# Altium PCB PCB.PcbDoc (part 1 of 2)
Units mm, origin at the board's own origin, x right, y up, seen from the top; angles counter-clockwise.
Board outline 44.8 x 23.3 mm, 4 copper layers (Top Layer, GND, VDD, Bottom Layer), stack 1.192 mm thick; 40 components, 63 nets, 241 pads, 86 vias.
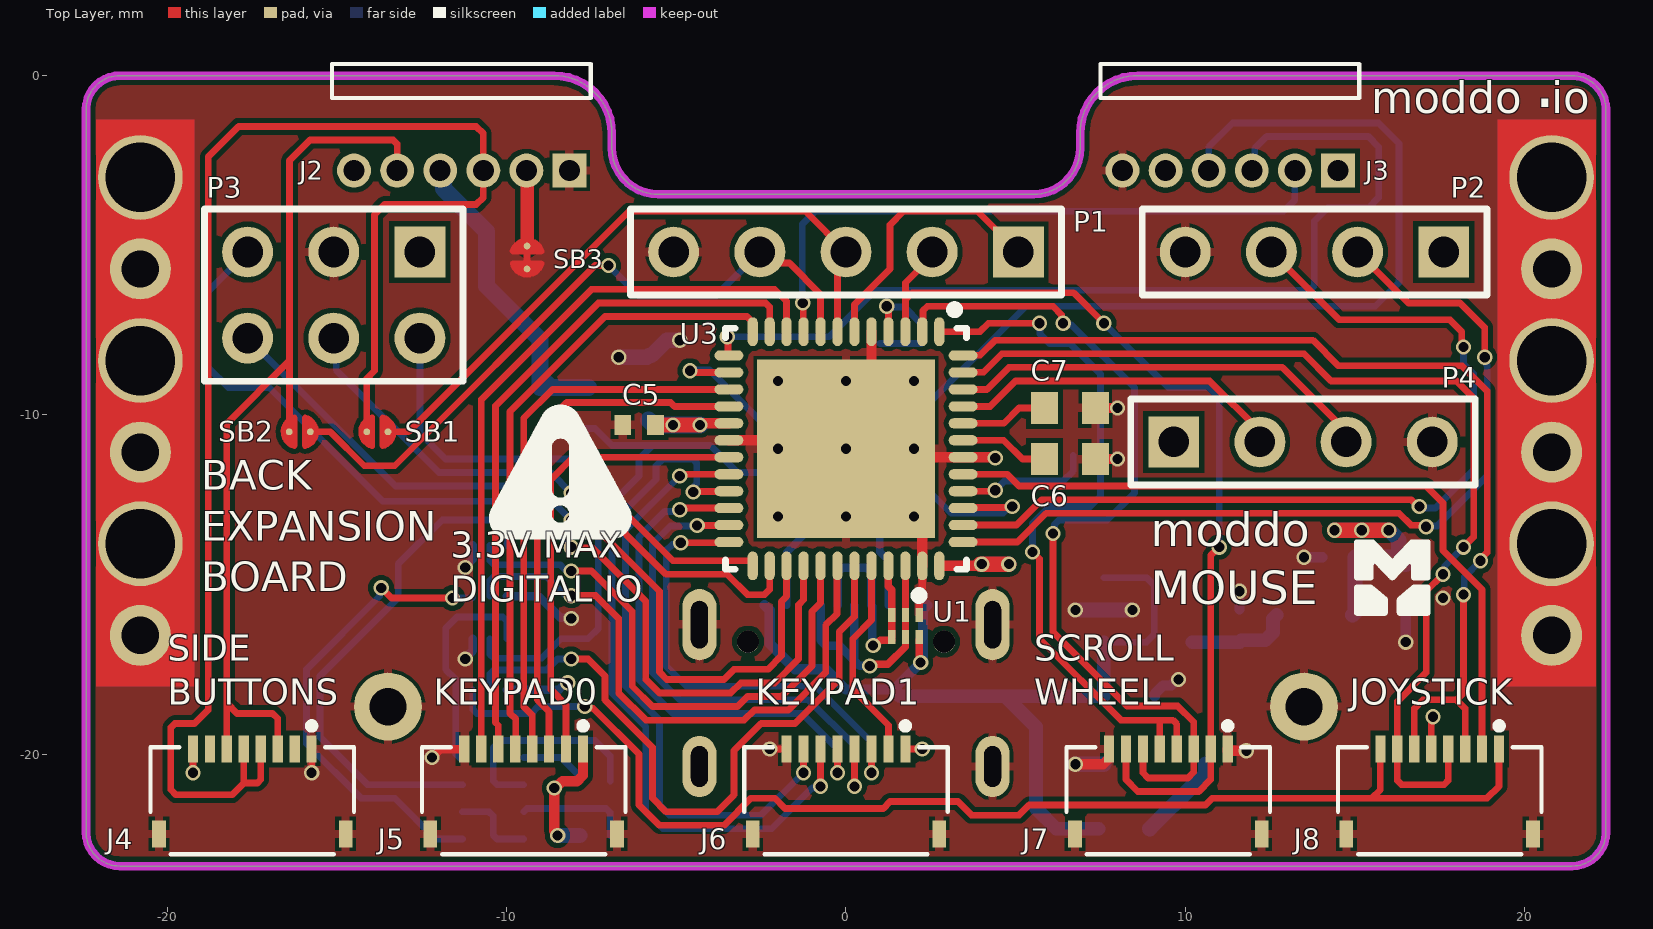
[diagram p0: Top Layer view]
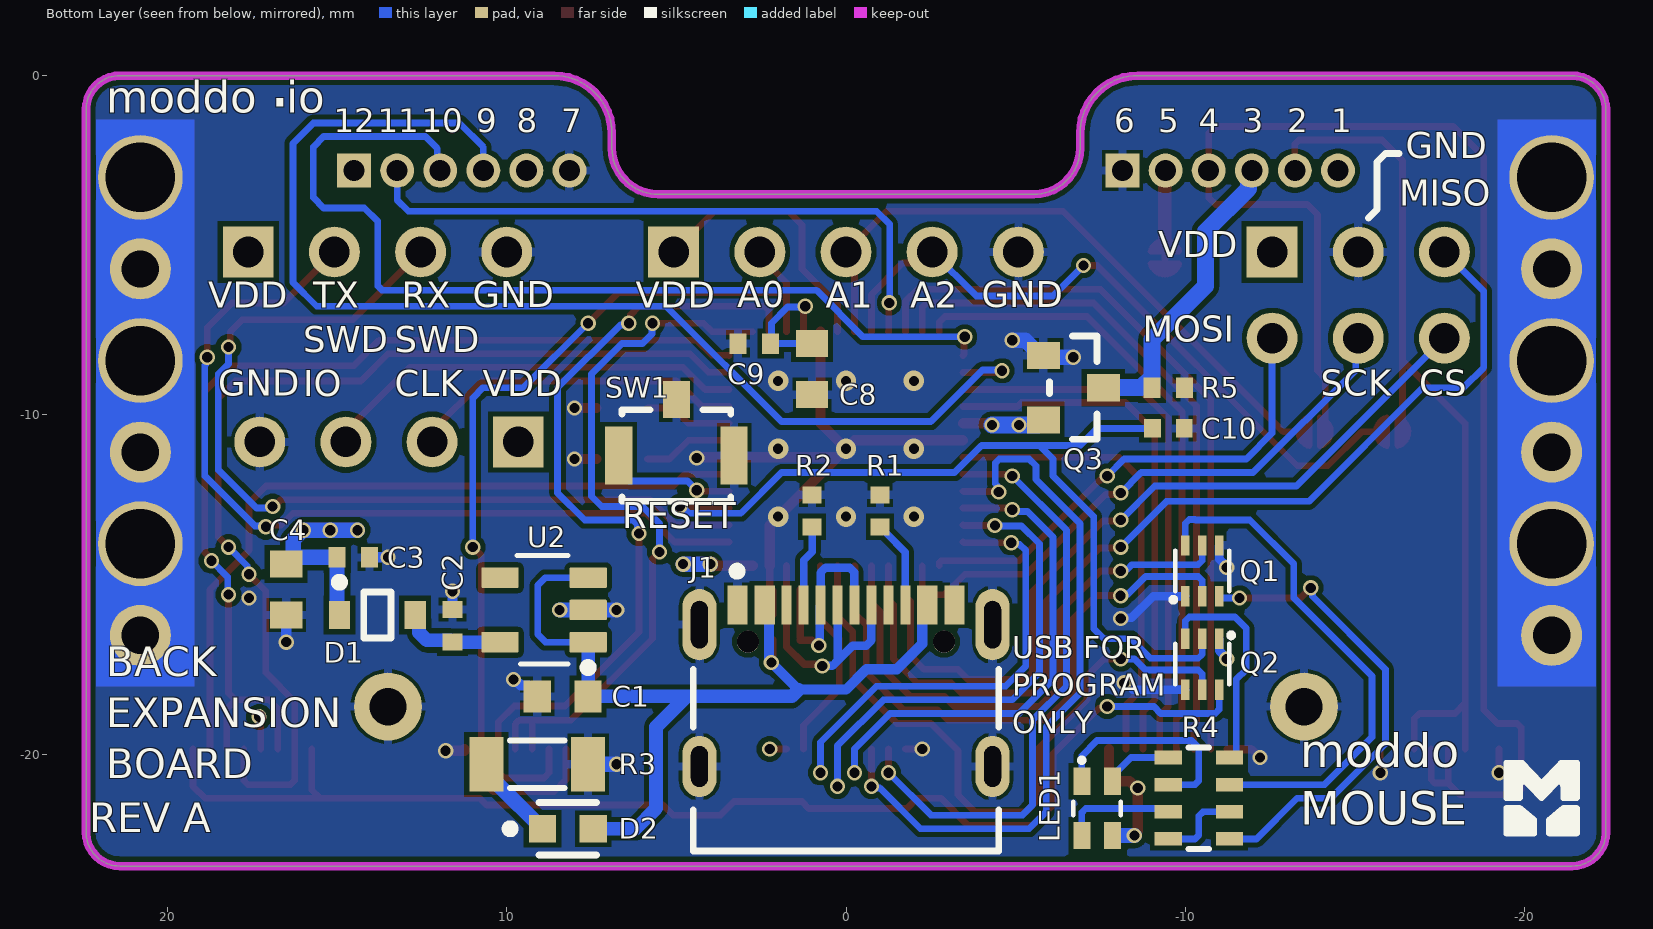
[diagram p1: Bottom Layer view, seen from below]
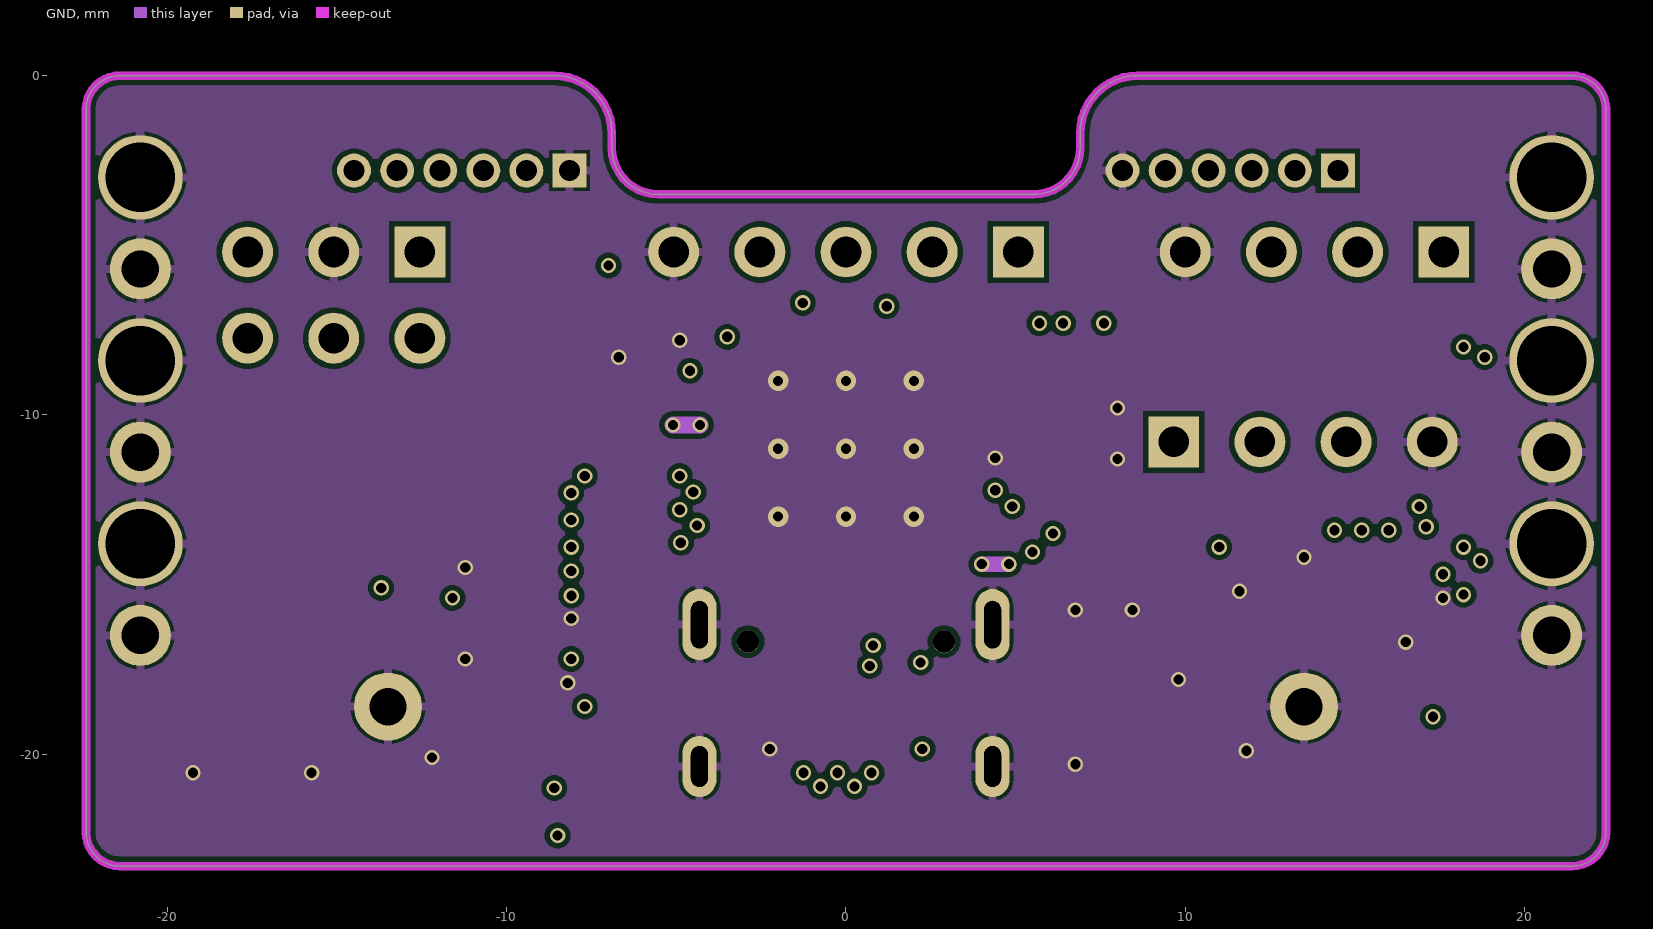
[diagram p2: GND]
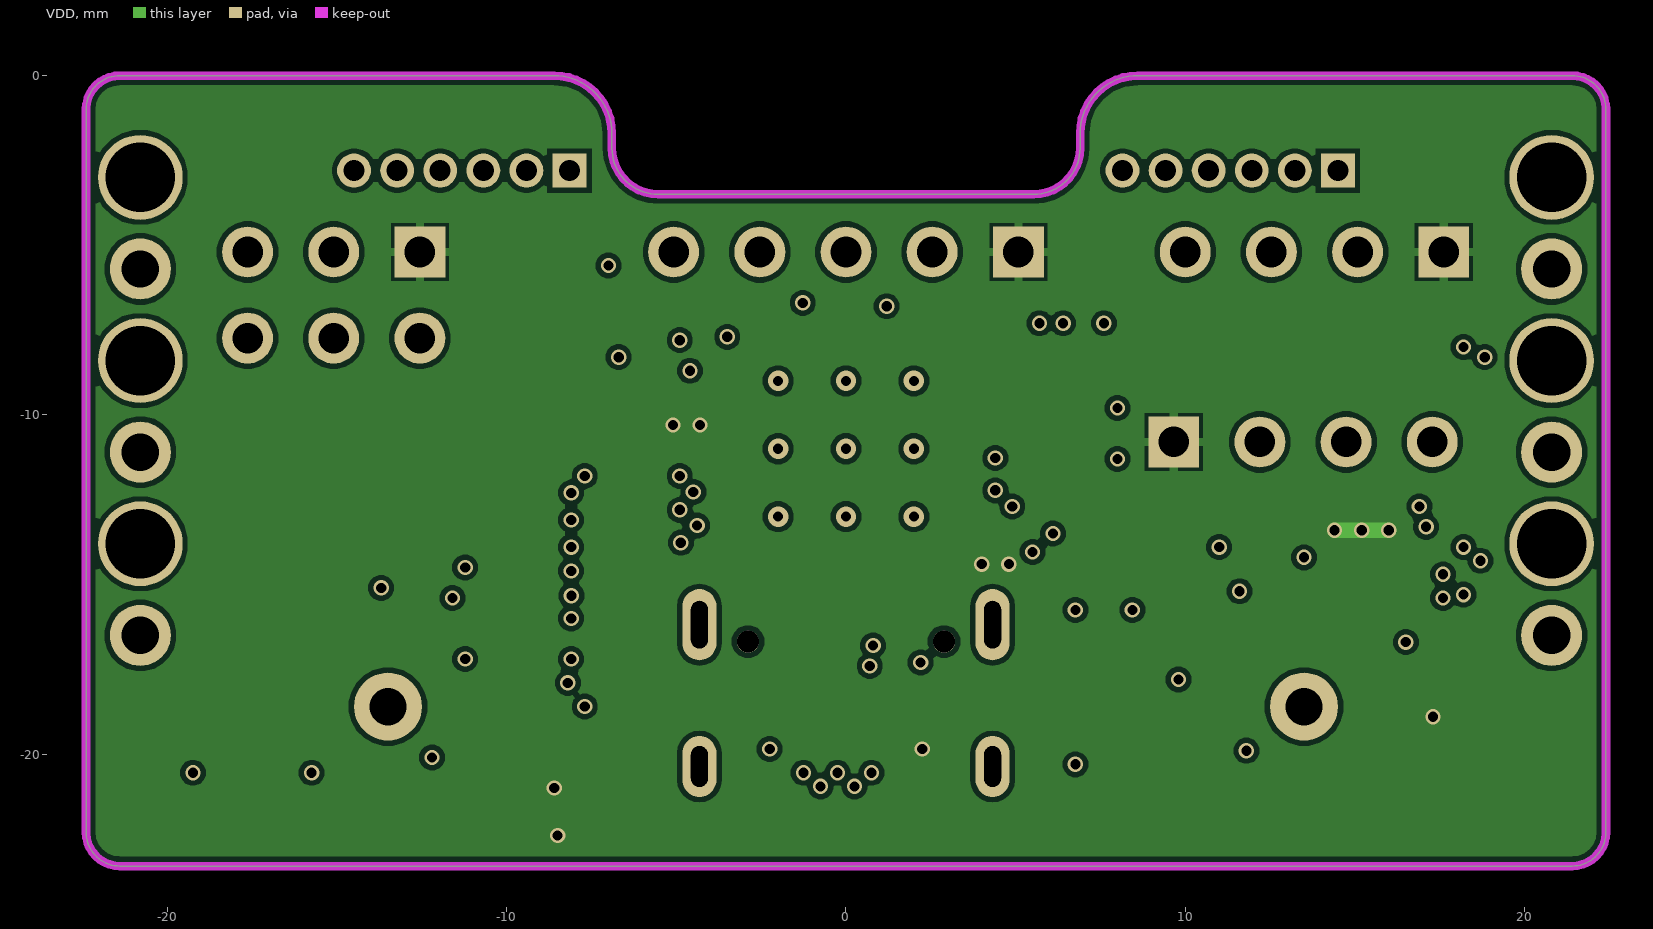
[diagram p3: VDD]
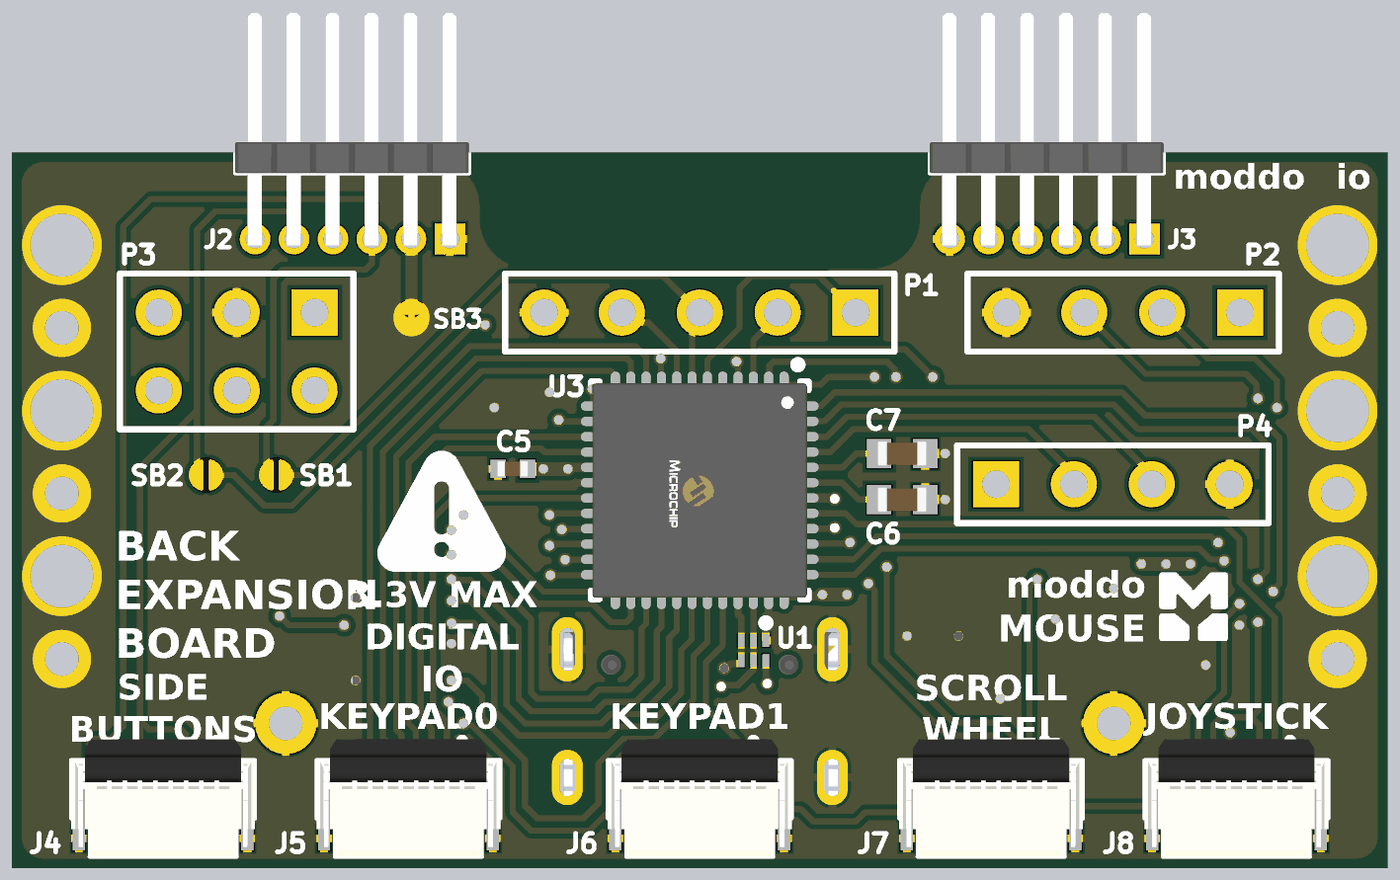
[diagram p4: 3D render of the assembled board from above, using the file's embedded part models]
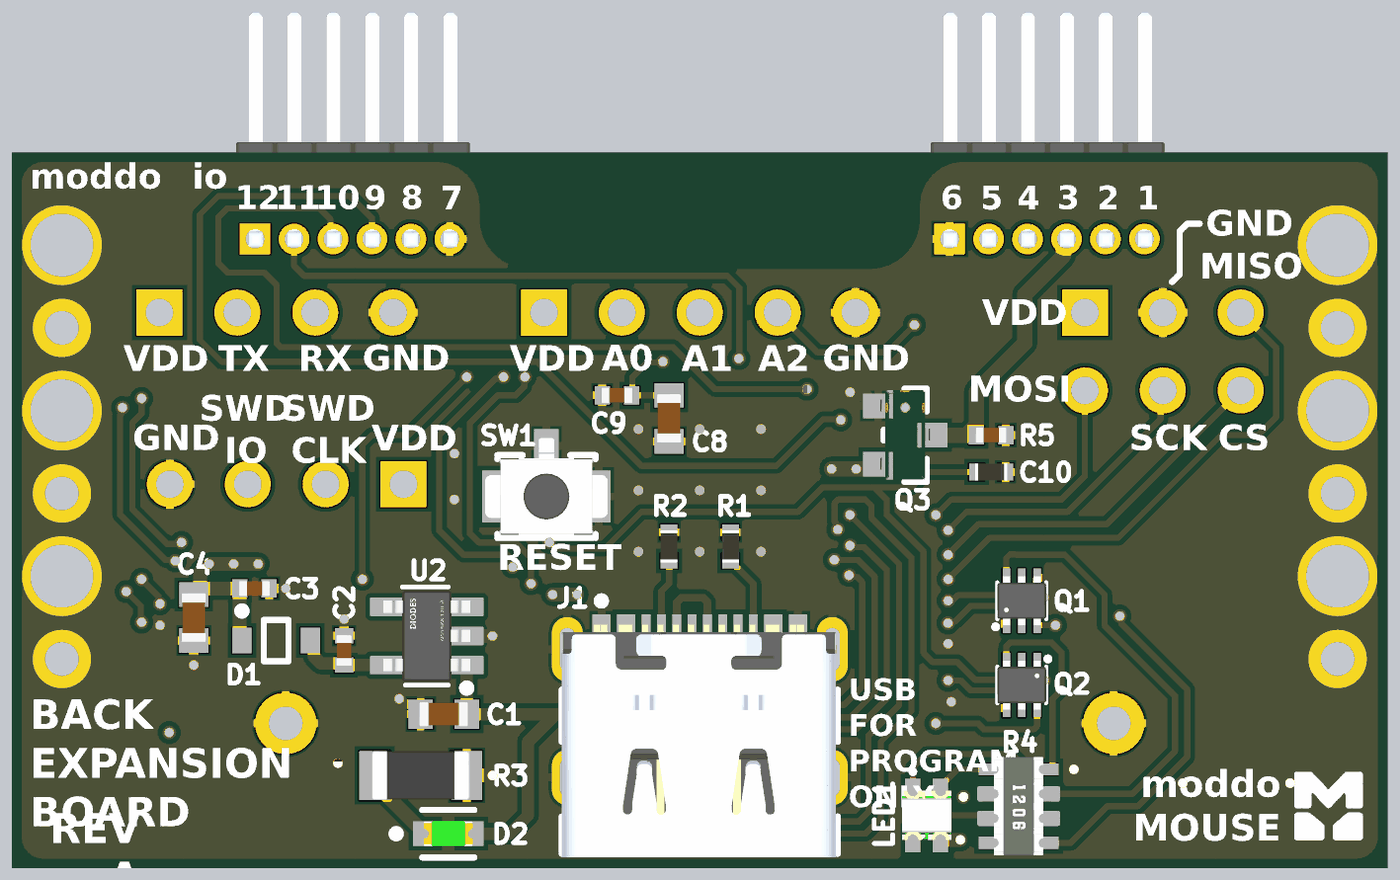
[diagram p5: 3D render of the assembled board from below, using the file's embedded part models]

## Layer stack, top to bottom
Top Solder: solder mask 0.0102, Solder Resist, Dk 3.5
Top Layer: signal copper 0.0356
Dielectric 2: prepreg 0.0711, PP-006, Dk 4.1
GND: signal copper 0.035
Dielectric 1: dielectric 0.9086, FR-4, Dk 4.8
VDD: signal copper 0.035
Dielectric 3: prepreg 0.0711, PP-006, Dk 4.1
Bottom Layer: signal copper 0.0356
Bottom Solder: solder mask 0.0102, Solder Resist, Dk 3.5

## Board outline
-22.4,-22.3 ccw(c-21.4,-22.3) -21.4,-23.3 21.4,-23.3 ccw(c21.4,-22.3) 22.4,-22.3 22.4,-1 ccw(c21.4,-1) 21.4,0 8.6,0 8.607,0 ccw(c8.607,-1.708) 6.899,-1.708 6.899,-2.136 cw(c5.537,-2.136) 5.537,-3.499 5.5,-3.5 -5.5,-3.5 -5.537,-3.499 cw(c-5.537,-2.136) -6.899,-2.136 -6.899,-1.708 ccw(c-8.607,-1.708) -8.607,0 -8.6,0 -21.4,0 ccw(c-21.4,-1) -22.4,-1

## Design rules (kind name [scope] priority, off if disabled: settings)
BoardOutlineClearance [All] p1: gap=0.2 ignorepadtopadclearanceinfootprint=FALSE
Clearance GND_bot [InNamedPolygon('GND_bot')] p1: gap=0.2 ignorepadtopadclearanceinfootprint=FALSE
Clearance GND_top [InNamedPolygon('GND_top')] p2: gap=0.1 ignorepadtopadclearanceinfootprint=FALSE
Clearance [All] p3: gap=0.15 ignorepadtopadclearanceinfootprint=FALSE
DiffPairsRouting [All] p1: maxlimit=0.254 minlimit=0.15 mostfreqgap=0.15 toplayer_minwidth=0.2 toplayer_maxwidth=0.381 toplayer_prefwidth=0.2 midlayer1_minwidth=0.2 midlayer1_maxwidth=0.381 midlayer1_prefwidth=0.2 midlayer2_minwidth=0.2 midlayer2_maxwidth=0.381 midlayer2_prefwidth=0.2 bottomlayer_minwidth=0.2 bottomlayer_maxwidth=0.381 bottomlayer_prefwidth=0.2 maxuncoupledlength=12.7
HoleSize [All] p1: absolutevalues=TRUE maxlimit=10 minlimit=0.025 maxpercent=80.000 minpercent=20.000
MinimumSolderMaskSliver [All] p1: minsoldermaskwidth=0.05
PolygonConnect [All] p1: thpad.connectstyle=Relief thpad.reliefconductorwidth=0.254 thpad.reliefentries=4 thpad.polygonreliefangle="90 Angle" thpad.airgapwidth=0.1 smdpad.connectstyle=Relief smdpad.reliefconductorwidth=0.254 smdpad.reliefentries=4 smdpad.polygonreliefangle="90 Angle" smdpad.airgapwidth=0.1 via.connectstyle=Direct via.reliefconductorwidth=0.254 via.reliefentries=4 via.polygonreliefangle="90 Angle" via.airgapwidth=0.254
RoutingVias [All] p1: holewidth=0.3 width=0.4 viastyle="Through Hole" minholewidth=0.3 minwidth=0.4 maxholewidth=2 maxwidth=10
SilkToSilkClearance [All] p1: silktosilkclearance=0.01
SilkToSolderMaskClearance [IsPad] p1: minsilkscreentomaskgap=0.001 clearancetoexposedcopper=TRUE
SolderMaskExpansion [All] p1: expansion=0.05 istentingtop=FALSE
SupplyNets "Schematic Supply Nets_5" [InNet('3V0')] p1: voltage=0.000
SupplyNets "Schematic Supply Nets_4" [InNet('VDD')] p2: voltage=0.000
SupplyNets "Schematic Supply Nets_3" [InNet('VUSB')] p3: voltage=0.000
SupplyNets "Schematic Supply Nets" [InNet('VDD_EXP')] p4: voltage=0.000
SupplyNets "Schematic Supply Nets_2" [InNet('VBUS')] p5: voltage=0.000
SupplyNets "Schematic Supply Nets_1" [InNet('GND')] p6: voltage=0.000
UnRoutedNet [All] p1: checkbadconnections=TRUE
Width [All] p1: maxlimit=2.54 minlimit=0.089 preferedwidth=0.254
24 further rules are at their usual default settings.

## Classes and differential pairs
differential pair USB_D: +USB_D_P -USB_D_N

## Components (designator, comment, footprint, x,y, rotation, side; value= is the part's Value field where it differs from the comment)
C1 "10uF" C0603 8.35,-18.3 r0 bottom value=10µF
C2 "0.1uF" C0402 11.6,-16.22 r270 bottom
C3 "0.1uF" C0402 14.52,-14.2 r0 bottom
C4 "10uF" C0603 16.5,-15.15 r270 bottom value=10µF
C5 "0.1uF" C0402 -6.1,-10.3 r0 top
C6 "10uF" C0603 6.6,-11.3 r0 top value=10µF
C7 "10uF" C0603 6.6,-9.8 r0 top value=10µF
C8 "10uF" C0603 1,-8.65 r270 bottom value=10µF
C9 "0.1uF" C0402 2.7,-7.9 r180 bottom
C10 "0.1uF" C0402 -9.5,-9.2 r0 bottom
D1 "MMDL770T1G" ONSC-SOD-323-2-477-02_V 13.815,-15.9 r180 bottom
D2 "LTST-C191KGKT" LED0603_G 8.2,-22.2 r180 bottom
J1 "12402012E212A" 12402012E212A 0,-19.2 r0 bottom
J2 "1271WR-6P" 1.27mm_6pins_MaleHeader_RightAngle -8.15,-2.8 r180 top
J3 "1271WR-6P" 1.27mm_6pins_MaleHeader_RightAngle 14.5,-2.8 r180 top
J4 "2328702-8" 2328702-8 -17.5,-23.2 r0 top
J5 "2328702-8" 2328702-8 -9.5,-23.2 r0 top
J6 "2328702-8" 2328702-8 0,-23.2 r0 top
J7 "2328702-8" 2328702-8 9.5,-23.2 r0 top
J8 "2328702-8" 2328702-8 17.5,-23.2 r0 top
LED1 "B38G3RGB-10D0003H2U1930" B38G3RGB-10D0003H2U1930 -7.4,-21.6 r270 bottom
P1 "Header 5" HDR1X5 5.08,-5.2 r180 top
P2 "Header 4" HDR1X4 17.62,-5.2 r180 top
P3 "Header 3X2" HDR2X3 -12.56,-5.2 r180 top
P4 "Header 4" HDR1X4 9.66,-10.8 r0 top
Q1 "SSM6N35AFE,LF" SSM6N35AFE,LF -10.5,-14.6 r90 bottom
Q2 "SSM6N35AFE,LF" SSM6N35AFE,LF -10.5,-17.35 r270 bottom
Q3 "IRLML6402TRPBF" IRLML6402TRPBF -6.7,-9.2 r180 bottom
R1 "5.1kR" R0402 -1,-12.83 r270 bottom value=5.1kΩ
R2 "5.1kR" R0402 1,-12.83 r270 bottom value=5.1kΩ
R3 "390R" R1206 9.1,-20.3 r0 bottom
R4 "33R" YC164-JR-0733RL -10.4,-21.3 r0 bottom
R5 "115kR" R0402 -9.5,-10.4 r180 bottom value=115kΩ
SB1 "Solderbridge" Solderbridge#1 -13.812,-10.5 r180 top
SB2 "Solderbridge" Solderbridge#2 -16.1,-10.5 r180 top
SB3 "Solderbridge" Solderbridge_Shorted -9.4,-5.362 r90 top net-tie
SW1 "B3U-1100P" FP-B3U-1100P-MFG 5,-11.2 r0 bottom
U1 "ESDR0502NMUTBG" ESDR0502NMUTBG 1.754,-16.225 r270 top
U2 "TPS7A2030PDBVR" TPS7A2030PDBVR 8.9,-15.75 r0 bottom
U3 "ATSAMD21G18A-MU" FP-C04-21493-MFG 0,-11 r270 top

## Footprints (in the part's own frame and the unit in brackets; to place one, negate y for a bottom-side part, rotate by r counter-clockwise, add the part's x,y. Pads: shape width x height; smd on the part's side, far side on the other; paste and mask are expansions set on the pad)
1.27mm_6pins_MaleHeader_RightAngle [mm]
  rect 1x1 hole 0.62 mask+0.05: 1(0,0)
  round 1 hole 0.62 mask+0.05: 2(1.27,0) 3(2.54,0) 4(3.81,0) 5(5.08,0) 6(6.35,0)
  silkscreen extent -0.63,-3.14 7,-2.14, body extent -0.62,-7.4 7,0.25, height 2.02
2328702-8 [mm]
  rect 0.3x0.8 smd mask+0.05: 1(1.75,3.35) 2(1.25,3.35) 3(0.75,3.35) 4(0.25,3.35) 5(-0.25,3.35) 6(-0.75,3.35) 7(-1.25,3.35) 8(-1.75,3.35)
  rect 0.4x0.8 smd mask+0.05: S1(2.75,0.85) S2(-2.75,0.85)
  silkscreen extent -3,0.25 3,4.13, body extent -3,0.25 3,4.08, height 1.06
12402012E212A [mm]
  oval 1x2.1 hole 0.5 slot 1.4 at 90 deg mask+0: 1(4.32,-3.015) 2(-4.32,-3.015)
  oval 1x1.8 hole 0.5 slot 1.2 at 90 deg mask+0: 3(4.32,1.165) 4(-4.32,1.165)
  rect 0.6x1.15 smd paste+0 mask+0: A1-B12(3.2,-3.59) A4-B9(2.4,-3.59) B1-A12(-3.2,-3.59) B4-A9(-2.4,-3.59)
  rect 0.3x1.15 smd paste+0 mask+0: A5(1.25,-3.59) A6(0.25,-3.59) A7(-0.25,-3.59) A8(-1.25,-3.59) B5(-1.75,-3.59) B6(-0.75,-3.59) B7(0.75,-3.59) B8(1.75,-3.59)
  round 0.65 hole 0.65 unplated paste-2539.97 mask+0: ""(-2.89,-2.515) ""(2.89,-2.515)
  silkscreen extent -4.5,-4.72 4.5,3.65, body extent -4.44,-3.82 4.5,3.78, height 3.28
B38G3RGB-10D0003H2U1930 [mm]
  rect 0.8x0.5 smd mask+0.02: 1(-0.8,-0.45) 2(-0.8,0.45) 3(0.8,0.45) 4(0.8,-0.45)
  silkscreen extent -1.49,-0.7 0.2,0.7, body extent -0.8,-0.8 0.8,0.8, height 0.35
C0402 [mm]
  rect 0.5x0.6 smd mask+0.05: 1(-0.48,0) 2(0.48,0)
  body extent -0.5,-0.25 0.5,0.25, height 0.5
C0603 [mm] "Chip Capacitor, 2-Leads, Body 1.60x0.80mm, IPC Medium Density"
  rect 0.8x0.95 smd mask+0.05: 1(-0.75,0) 2(0.75,0)
  body extent -0.8,-0.4 0.8,0.4, height 0.8
ESDR0502NMUTBG [mm] "SON, 6-Leads, Body 1.2x1mm, Pitch 0.4mm"
  rect 0.42x0.22 smd: 1(-0.325,0.4) 2(-0.325,0) 3(-0.325,-0.4) 4(0.325,-0.4) 5(0.325,0) 6(0.325,0.4)
  silkscreen extent -1.02,0.28 -0.78,0.53, body extent -0.5,-0.6 0.5,0.6, height 0.55
FP-B3U-1100P-MFG [mm]
  rect 0.8x1.7 smd paste+0 mask+0: 1(1.7,0) 2(-1.7,0)
  rect 0.8x1.1 smd paste+0 mask+0: 3(0,-1.65)
  silkscreen extent -1.6,-1.35 1.6,1.35, body extent -2,-1.9 2,1.25, height 1.75
FP-C04-21493-MFG [mm]
  rrect100% 0.85x0.3 smd paste+0 mask+0: 1(-3.45,2.75) 2(-3.45,2.25) 3(-3.45,1.75) 4(-3.45,1.25) 5(-3.45,0.75) 6(-3.45,0.25) 7(-3.45,-0.25) 8(-3.45,-0.75) 9(-3.45,-1.25) 10(-3.45,-1.75) 11(-3.45,-2.25) 12(-3.45,-2.75) 25(3.45,-2.75) 26(3.45,-2.25) 27(3.45,-1.75) 28(3.45,-1.25) 29(3.45,-0.75) 30(3.45,-0.25) 31(3.45,0.25) 32(3.45,0.75) 33(3.45,1.25) 34(3.45,1.75) 35(3.45,2.25) 36(3.45,2.75)
  rrect100% 0.3x0.85 smd paste+0 mask+0: 13(-2.75,-3.45) 14(-2.25,-3.45) 15(-1.75,-3.45) 16(-1.25,-3.45) 17(-0.75,-3.45) 18(-0.25,-3.45) 19(0.25,-3.45) 20(0.75,-3.45) 21(1.25,-3.45) 22(1.75,-3.45) 23(2.25,-3.45) 24(2.75,-3.45) 37(2.75,3.45) 38(2.25,3.45) 39(1.75,3.45) 40(1.25,3.45) 41(0.75,3.45) 42(0.25,3.45) 43(-0.25,3.45) 44(-0.75,3.45) 45(-1.25,3.45) 46(-1.75,3.45) 47(-2.25,3.45) 48(-2.75,3.45)
  rect 5.25x5.25 smd paste+0 mask+0: 49(0,0)
  silkscreen extent -4.22,-3.55 3.55,3.55, body extent -3.98,-3.98 3.98,3.98, height 0.25
HDR1X4 [mm] "Connector; Header; 4 Position"
  rect 1.5x1.5 hole 0.9: 1(0,0)
  round 1.5 hole 0.9: 2(2.54,0) 3(5.08,0) 4(7.62,0)
  silkscreen extent -1.27,-1.27 8.89,1.27
HDR1X5 [mm] "Connector; Header; 5 Position"
  rect 1.5x1.5 hole 0.9: 1(0,0)
  round 1.5 hole 0.9: 2(2.54,0) 3(5.08,0) 4(7.62,0) 5(10.16,0)
  silkscreen extent -1.27,-1.27 11.43,1.27
HDR2X3 [mm] "Connector; Header; 3x2 Position"
  rect 1.5x1.5 hole 0.9: 1(0,0)
  round 1.5 hole 0.9: 2(0,2.54) 3(2.54,0) 4(2.54,2.54) 5(5.08,0) 6(5.08,2.54)
  silkscreen extent -1.27,-1.27 6.35,3.81
IRLML6402TRPBF [mm]
  rect 0.972x0.802 smd paste+0 mask+0: 1(-0.885,0.95) 2(-0.885,-0.95) 3(0.885,0)
  silkscreen extent -0.7,-1.52 0.7,1.52, body extent -1.18,-1.45 1.18,1.47, height 1.12
LED0603_G [mm]
  rect 0.8x0.8 smd paste+0 mask+0: 1(-0.75,0) 2(0.75,0)
  silkscreen extent -1.83,-0.77 0.85,0.77, body extent -0.8,-0.4 0.8,0.4, height 0.65
ONSC-SOD-323-2-477-02_V [mm] "SOD, 2-Leads, Body 1.7x1.25mm"
  rect 0.63x0.83 smd: 1(-1.115,0) 2(1.115,0)
  silkscreen extent -1.24,-0.67 0.4,1.09, body extent -0.85,-0.63 0.85,0.63, height 1.06
R0402 [mm]
  rect 0.5x0.55 smd mask+0.05: 1(-0.47,0) 2(0.47,0)
  body extent -0.53,-0.28 0.53,0.28, height 0.35
R1206 [mm]
  rect 1x1.6 smd mask+0.06: 1(-1.5,0) 2(1.5,0)
  silkscreen extent -0.8,-0.7 0.8,0.7, body extent -1.6,-0.8 1.6,0.8, height 1.5
Solderbridge#1 [mm]
  round 0.2 smd paste-10: 1(-0.312,0) 2(0.312,0)
  Top Layer region: 0.077,0.432 0.152,0.505 0.271,0.467 0.335,0.424 0.409,0.351 0.462,0.292 0.521,0.193 0.549,0.099 0.544,-0.122 0.518,-0.193 0.434,-0.33 0.351,-0.411 0.259,-0.469 0.157,-0.5 0.107,-0.483 0.077,-0.43
  Top Layer region: -0.077,-0.432 -0.152,-0.505 -0.271,-0.467 -0.335,-0.424 -0.409,-0.351 -0.462,-0.292 -0.521,-0.193 -0.549,-0.099 -0.544,0.122 -0.518,0.193 -0.434,0.33 -0.351,0.411 -0.259,0.469 -0.157,0.5 -0.107,0.483 -0.077,0.43
  Top Layer lines w0.152: 0.153,0.431 cw(c0.042,0) 0.312,-0.353 cw(c0.042,0) 0.153,-0.431 ; -0.153,0.431 ccw(c-0.042,0) -0.471,0.118 ccw(c-0.042,0) -0.487,0 ccw(c-0.042,0) -0.471,-0.118 ccw(c-0.042,0) -0.461,-0.149 ccw(c-0.042,0) -0.153,-0.431
Solderbridge#2 [mm]
  round 0.2 smd paste-10: 1(-0.312,0) 2(0.312,0)
  Top Layer region: 0.077,0.432 0.152,0.505 0.271,0.467 0.335,0.424 0.409,0.351 0.462,0.292 0.521,0.193 0.549,0.099 0.544,-0.122 0.518,-0.193 0.434,-0.33 0.351,-0.411 0.259,-0.469 0.157,-0.5 0.107,-0.483 0.077,-0.43
  Top Layer region: -0.077,-0.432 -0.152,-0.505 -0.271,-0.467 -0.335,-0.424 -0.409,-0.351 -0.462,-0.292 -0.521,-0.193 -0.549,-0.099 -0.544,0.122 -0.518,0.193 -0.434,0.33 -0.351,0.411 -0.259,0.469 -0.157,0.5 -0.107,0.483 -0.077,0.43
  Top Layer lines w0.152: 0.153,0.431 cw(c0.042,0) 0.312,-0.353 cw(c0.042,0) 0.3,-0.362 cw(c0.042,0) 0.153,-0.431 ; -0.153,0.431 ccw(c-0.042,0) -0.461,0.149 ccw(c-0.042,0) -0.471,0.118 ccw(c-0.042,0) -0.487,0 ccw(c-0.042,0) -0.471,-0.118 ccw(c-0.042,0) -0.153,-0.431
Solderbridge_Shorted [mm]
  round 0.2 smd paste-10: 1(-0.338,0) 2(0.338,0)
  Top Layer region: -0.102,-0.432 -0.178,-0.505 -0.296,-0.467 -0.361,-0.424 -0.434,-0.351 -0.488,-0.292 -0.546,-0.193 -0.574,-0.099 -0.569,0.122 -0.544,0.193 -0.46,0.33 -0.376,0.411 -0.284,0.469 -0.183,0.5 -0.132,0.483 -0.102,0.43
  Top Layer region: 0.102,0.432 0.178,0.505 0.296,0.467 0.361,0.424 0.434,0.351 0.488,0.292 0.546,0.193 0.574,0.099 0.569,-0.122 0.544,-0.193 0.46,-0.33 0.376,-0.411 0.284,-0.469 0.183,-0.5 0.132,-0.483 0.102,-0.43
  Top Layer lines w0.152: -0.178,0.431 ccw(c-0.068,0) -0.178,-0.431 ; 0.178,0.431 cw(c0.068,0) 0.178,-0.431
  Top Layer lines w0.203: -0.338,0 0.338,0
SSM6N35AFE,LF [mm]
  rect 0.6x0.25 smd mask+0.051: 1(-0.75,0.5) 2(-0.75,0) 3(-0.75,-0.5) 4(0.75,-0.5) 5(0.75,0) 6(0.75,0.5)
  silkscreen extent -0.92,-0.8 0.6,0.92, body extent -0.8,-0.8 0.8,0.8, height 0.61
TPS7A2030PDBVR [mm]
  rrect9% 1.1x0.6 smd paste+0 mask+0: 1(-1.3,0.95) 2(-1.3,0) 3(-1.3,-0.95) 4(1.3,-0.95) 5(1.3,0.95)
  silkscreen extent -1.42,-1.6 0.8,1.82, body extent -1.41,-1.48 1.41,1.48, height 1.45
YC164-JR-0733RL [mm]
  rect 0.8x0.4 smd paste+0 mask+0.02: 1(-0.9,1.2) 4(-0.9,-1.2) 5(0.9,-1.2) 8(0.9,1.2)
  rect 0.8x0.4 smd paste+0.05 mask+0.02: 2(-0.9,0.4) 3(-0.9,-0.4) 6(0.9,-0.4) 7(0.9,0.4)
  silkscreen extent -0.3,-1.5 0.3,1.5, body extent -0.8,-1.6 0.81,1.6, height 0.45

## Part data
C1 C4 C6 C7 C8: library part GRM188R61E106KA73D, "25V 10uF X5R ±10% 0603 Multilayer Ceramic Capacitors MLCC - SMD/SMT ROHS", Case/Package=0603, Dielectric=X5R, Dielectric Material=Ceramic, Manufacturer=Murata, Manufacturer Lifecycle Status="IN PRODUCTION", Max Operating Temperature=85°C, Min Operating Temperature=-55°C, Supplier Part Number=92AH5110, Tolerance=10%, Voltage Rating=25V, Capacitance=10uF, Category="Ceramic Capacitors", ComponentLink1Description=https://datasheet.octopart.com:443/GRM188R61E106KA73D-Murata-datasheet-149523249.pdf?src-supplier=Newark, ComponentLink1URL=https://datasheet.octopart.com:443/GRM188R61E106KA73D-Murata-datasheet-149523249.pdf?src-supplier=Newark, ComponentLink2Description=https://datasheet.octopart.com:443/GRM188R61E106KA73D-Murata-datasheet-165579666.pdf?src-supplier=TME, ComponentLink2URL=https://datasheet.octopart.com:443/GRM188R61E106KA73D-Murata-datasheet-165579666.pdf?src-supplier=TME, ComponentLink3Description=https://datasheet.octopart.com:443/GRM188R61E106KA73D-Murata-datasheet-141274968.pdf?src-supplier=Ciiva, ComponentLink3URL=https://datasheet.octopart.com:443/GRM188R61E106KA73D-Murata-datasheet-141274968.pdf?src-supplier=Ciiva, ComponentLink4Description=https://datasheet.octopart.com:443/GRM188R61E106KA73D-Murata-datasheet-140704821.pdf?src-supplier=Ciiva, ComponentLink4URL=https://datasheet.octopart.com:443/GRM188R61E106KA73D-Murata-datasheet-140704821.pdf?src-supplier=Ciiva, ComponentLink5Description=https://datasheet.octopart.com:443/GRM188R61E106KA73D-Murata-datasheet-138742889.pdf?src-supplier=Ciiva, ComponentLink5URL=https://datasheet.octopart.com:443/GRM188R61E106KA73D-Murata-datasheet-138742889.pdf?src-supplier=Ciiva, ComponentLink6Description=https://datasheet.octopart.com/GRM188R61E106KA73D-Murata-datasheet-12515295.pdf, ComponentLink6URL=https://datasheet.octopart.com/GRM188R61E106KA73D-Murata-datasheet-12515295.pdf, ComponentLink7Description=https://datasheet.octopart.com/GRM188R61E106KA73D-Murata-datasheet-12510076.pdf, ComponentLink7URL=https://datasheet.octopart.com/GRM188R61E106KA73D-Murata-datasheet-12510076.pdf, ComponentLink8Description=https://datasheet.octopart.com/GRM188R61E106KA73D-Murata-datasheet-11978611.pdf, ComponentLink8URL=https://datasheet.octopart.com/GRM188R61E106KA73D-Murata-datasheet-11978611.pdf, ComponentLink9Description=https://datasheet.octopart.com/GRM188R61E106KA73D-Murata-datasheet-10025737.pdf, ComponentLink9URL=https://datasheet.octopart.com/GRM188R61E106KA73D-Murata-datasheet-10025737.pdf, ComponentLink10Description=https://datasheet.octopart.com/GRM188R61E106KA73D-Murata-datasheet-8819587.pdf, ComponentLink10URL=https://datasheet.octopart.com/GRM188R61E106KA73D-Murata-datasheet-8819587.pdf, ComponentLink11Description=http://sigma.octopart.com:80/reach_statement/Murata-company-16.pdf?src-supplier=Compliance+Statements, ComponentLink11URL=http://sigma.octopart.com:80/reach_statement/Murata-company-16.pdf?src-supplier=Compliance+Statements, Height=800µm, Length=1.6mm, Lifecycle Status=Production, Manufacturer Part Number=GRM188R61E106KA73D, Material=Ceramic, Mounting Technology="Surface Mount", Number of Terminals=2, Pricing="4000=0.064, 8000=0.06, 16000=0.06, 24000=0.059 (CAD)", REACH SVHC=Yes, RoHS=Compliant, Schedule B="8532240020, 8532240020|8532240020|8532240020|8532240020|8532240020", Stock=108000, Supplier=Newark, Thickness=800µm, Voltage Rating (DC)=25V, Width=800µm
C2 C3 C5 C9 C10: library part CL05B104KA5NNNC, "25V 100nF X7R ±10% 0402 Multilayer Ceramic Capacitors MLCC - SMD/SMT ROHS", Case Code (Imperial)=0402, Case Code (Metric)=1005, Dielectric=X7R, Dielectric Material=Ceramic, Manufacturer="Samsung Electro-Mechanics", Max Operating Temperature=125°C, Min Operating Temperature=-55°C, Supplier Part Number 1=1276-6720-1-ND, Tolerance=10%, Voltage Rating=25V, Capacitance=0.1uF, Case/Package=0402, Category="Ceramic Capacitors", China RoHS=Compliant, ComponentLink1Description=https://datasheet.octopart.com:443/CL05B104KA5NNNC-Samsung-Electro-Mechanics-datasheet-136876160.pdf?src-supplier=Samsung+SCT, ComponentLink1URL=https://datasheet.octopart.com:443/CL05B104KA5NNNC-Samsung-Electro-Mechanics-datasheet-136876160.pdf?src-supplier=Samsung+SCT, ComponentLink2Description=https://datasheet.octopart.com:443/CL05B104KA5NNNC-Samsung-Electro-Mechanics-datasheet-116890910.pdf?src-supplier=Future+Electronics, ComponentLink2URL=https://datasheet.octopart.com:443/CL05B104KA5NNNC-Samsung-Electro-Mechanics-datasheet-116890910.pdf?src-supplier=Future+Electronics, ComponentLink3Description=https://datasheet.octopart.com:443/CL05B104KA5NNNC-Samsung-Electro-Mechanics-datasheet-104201047.pdf?src-supplier=Future+Electronics, ComponentLink3URL=https://datasheet.octopart.com:443/CL05B104KA5NNNC-Samsung-Electro-Mechanics-datasheet-104201047.pdf?src-supplier=Future+Electronics, ComponentLink4Description=https://datasheet.octopart.com:443/CL05B104KA5NNNC-Samsung-Electro-Mechanics-datasheet-148801811.pdf?src-supplier=Future+Electronics, ComponentLink4URL=https://datasheet.octopart.com:443/CL05B104KA5NNNC-Samsung-Electro-Mechanics-datasheet-148801811.pdf?src-supplier=Future+Electronics, ComponentLink5Description=https://datasheet.octopart.com/CL05B104KA5NNNC-Samsung-Electro-Mechanics-datasheet-97040617.pdf, ComponentLink5URL=https://datasheet.octopart.com/CL05B104KA5NNNC-Samsung-Electro-Mechanics-datasheet-97040617.pdf, ComponentLink6Description=https://datasheet.octopart.com/CL05B104KA5NNNC-Samsung-Electro-Mechanics-datasheet-8324245.pdf, ComponentLink6URL=https://datasheet.octopart.com/CL05B104KA5NNNC-Samsung-Electro-Mechanics-datasheet-8324245.pdf, ComponentLink7Description=https://datasheet.octopart.com:443/CL05B104KA5NNNC-Samsung-datasheet-8326407.pdf?src-supplier=TME, ComponentLink7URL=https://datasheet.octopart.com:443/CL05B104KA5NNNC-Samsung-datasheet-8326407.pdf?src-supplier=TME, Height=500µm, Length=1mm, Lifecycle Status=Production, Manufacturer Part Number=CL05B104KA5NNNC, Material=Ceramic, Mounting Technology="Surface Mount", Number of Terminals=2, Pricing 1="1=0.08, 10=0.004, 50=0.0036, 100=0.0032 (USD)", REACH SVHC=Yes, RoHS=Compliant, Schedule B="8532240020, 8532240020|8532240020|8532240020|8532240020|8532240020|8532240020|8532240020|8532240020|8532240020|8532240020|8532240020|8532240020|8532240020|8532240020|8532240020|8532240020|8532240020|8532240020|8532240020|8532240020|8532240020|8532240020|8532240020|85", Stock 1=1082110, Supplier 1=DigiKey, Thickness=558.8µm, Voltage Rating (DC)=25V, Width=500µm
D1: "Schottky Barrier Diode, 2-Pin SOD-323, Pb-Free, Tape and Reel", Case/Package=SOD-323-2, Current Rating=100mA, Forward Current=10mA, Forward Voltage=1V, Manufacturer="On Semiconductor", Manufacturer Lifecycle Status=ACTIVE, Max Operating Temperature=150°C, Max Power Dissipation=200mW, Max Repetitive Reverse Voltage (Vrrm)=70V, Max Reverse Leakage Current=200nA, Min Operating Temperature=-55°C, Supplier Part Number=26K4556, Category="Schottky Diodes", China RoHS=Compliant, ComponentLink1Description="Manufacturer URL", ComponentLink1URL=http://www.onsemi.com/, ComponentLink2Description=Datasheet, ComponentLink2URL=http://www.onsemi.cn/pub_link/Collateral/MMDL770T1-D.PDF, ComponentLink3Description="Package Specification", ComponentLink3URL=http://www.onsemi.com/pub_link/Collateral/477-02.PDF.1, ComponentLink4Description=https://datasheet.octopart.com:443/MMDL770T1G-onsemi-datasheet-180963709.pdf?src-supplier=IHS, ComponentLink4URL=https://datasheet.octopart.com:443/MMDL770T1G-onsemi-datasheet-180963709.pdf?src-supplier=IHS, ComponentLink5Description=https://datasheet.octopart.com:443/MMDL770T1G-ON-Semiconductor-datasheet-36854408.pdf?src-supplier=element14+APAC, ComponentLink5URL=https://datasheet.octopart.com:443/MMDL770T1G-ON-Semiconductor-datasheet-36854408.pdf?src-supplier=element14+APAC, ComponentLink6Description=https://datasheet.octopart.com:443/MMDL770T1G-ON-Semiconductor-datasheet-5319181.pdf?src-supplier=onsemi, ComponentLink6URL=https://datasheet.octopart.com:443/MMDL770T1G-ON-Semiconductor-datasheet-5319181.pdf?src-supplier=onsemi, ComponentLink7Description=https://datasheet.octopart.com:443/MMDL770T1G-onsemi-datasheet-182017838.pdf?src-supplier=Farnell, ComponentLink7URL=https://datasheet.octopart.com:443/MMDL770T1G-onsemi-datasheet-182017838.pdf?src-supplier=Farnell, ComponentLink8Description=https://datasheet.octopart.com:443/MMDL770T1G-onsemi-datasheet-12512631.pdf?src-supplier=Electro+Sonic, ComponentLink8URL=https://datasheet.octopart.com:443/MMDL770T1G-onsemi-datasheet-12512631.pdf?src-supplier=Electro+Sonic, ComponentLink9Description=https://datasheet.octopart.com:443/MMDL770T1G-ON-Semiconductor-datasheet-14055236.pdf?src-supplier=iiiC, ComponentLink9URL=https://datasheet.octopart.com:443/MMDL770T1G-ON-Semiconductor-datasheet-14055236.pdf?src-supplier=iiiC, ComponentLink10Description=http://sigma.octopart.com:80/150618769/rohs_statement/ON-Semiconductor-MMDL770T1G.pdf?src-supplier=Compliance+Statements, ComponentLink10URL=http://sigma.octopart.com:80/150618769/rohs_statement/ON-Semiconductor-MMDL770T1G.pdf?src-supplier=Compliance+Statements, ComponentLink11Description=http://sigma.octopart.com:80/reach_statement/ON-Semiconductor-company-79.pdf?src-supplier=Compliance+Statements, ComponentLink11URL=http://sigma.octopart.com:80/reach_statement/ON-Semiconductor-company-79.pdf?src-supplier=Compliance+Statements, ComponentLink12Description=https://octopart.com:443/opatz8j6/c1?t=rGUbnPQX5GDmqEoGA-uR9SMXeEE7gORXoUpQk9tSLLSbDH3jegWqyoKxn1aLDysZ9F5UsAZS4pPStALKuwhJs2fCT0RUcZefN4YW3NRJTnKxS4A-_hdC7myPNVw6LMAUwIC-S9tezZfVA4A1ydwTwICm1Zig62LOizv3-I4cESK-S3z73XMi6jENgAwvT9WW2Ujns6vlfkFPR1ge60eOsdw7mCv_eawZuRnDiCvhTwxevApDMfItvTsY4qOoFIyWXnC3xRoUEF-kP7l_SrDrtqPP9kRW2I59JGoGtbuF7U1X9Kz7fF6DLUUU8OKOHaq00oGLbmB3QQR_ilBlaPwbBtyCq9UFUCFQV3Lx&src-supplier=Compliance+Statements, ComponentLink12URL=https://octopart.com:443/opatz8j6/c1?t=rGUbnPQX5GDmqEoGA-uR9SMXeEE7gORXoUpQk9tSLLSbDH3jegWqyoKxn1aLDysZ9F5UsAZS4pPStALKuwhJs2fCT0RUcZefN4YW3NRJTnKxS4A-_hdC7myPNVw6LMAUwIC-S9tezZfVA4A1ydwTwICm1Zig62LOizv3-I4cESK-S3z73XMi6jENgAwvT9WW2Ujns6vlfkFPR1ge60eOsdw7mCv_eawZuRnDiCvhTwxevApDMfItvTsY4qOoFIyWXnC3xRoUEF-kP7l_SrDrtqPP9kRW2I59JGoGtbuF7U1X9Kz7fF6DLUUU8OKOHaq00oGLbmB3QQR_ilBlaPwbBtyCq9UFUCFQV3Lx&src-supplier=Compliance+Statements, ComponentLink13Description=https://octopart.com:443/opatz8j6/c1?t=xWlJBbSOjuihLu5tuYbHtsOtU_1QEHMfXja7QzQLZunojekw5uNnIM6cdSsnrAiuel8TWOmyDr2oU2k5holZexZGehk33AL-VJp_F-YhdfFYCHMkiSGbs39G6IHVRAjVdbrrjoHKUeBgpuPxzOORf6r5STdjFqtSwLT9Nq4Bz44wz_CIS2ZBWUVn7GkwGD0qpIrqRgfjV-NMFfhaHRoet9F-4YHZTFqxnCOCPSqoXpX2X76YlNkd9rQHSxjoEhR65VTyaE62P0vZksiIy9_tvP3cuZ7OKmIIlGt_ji7T3rxylmYploIrt9FpCqpYCsF1M5B6QleRuxMliCf8adPp1S-NqaPXrK-rp0vGQA&src-supplier=Compliance+Statements, ComponentLink13URL=https://octopart.com:443/opatz8j6/c1?t=xWlJBbSOjuihLu5tuYbHtsOtU_1QEHMfXja7QzQLZunojekw5uNnIM6cdSsnrAiuel8TWOmyDr2oU2k5holZexZGehk33AL-VJp_F-YhdfFYCHMkiSGbs39G6IHVRAjVdbrrjoHKUeBgpuPxzOORf6r5STdjFqtSwLT9Nq4Bz44wz_CIS2ZBWUVn7GkwGD0qpIrqRgfjV-NMFfhaHRoet9F-4YHZTFqxnCOCPSqoXpX2X76YlNkd9rQHSxjoEhR65VTyaE62P0vZksiIy9_tvP3cuZ7OKmIIlGt_ji7T3rxylmYploIrt9FpCqpYCsF1M5B6QleRuxMliCf8adPp1S-NqaPXrK-rp0vGQA&src-supplier=Compliance+Statements, Configuration=Single, Country of Origin="Mainland China", DatasheetVersion="Rev. 3", Element Configuration=Single, Export Control Classification Number (ECCN) Code=EAR99, Harmonized Tariff Schedule (HTS) Code=8541.10.00.60, Height=1mm, Introduction Date=2000-01-01, Lead Free="Lead Free", Length=1.8mm, Lifecycle Status=Production, Manufacturer Part Number=MMDL770T1G, Max Reverse Voltage (DC)=70V, Mounting Technology="Surface Mount", Number of Elements=1, Number of Terminals=2, Output Current=100mA, PackageDescription="2-Pin SOD, Body 1.7 x 1.25 mm", PackageReference=SOD-323-2-477-02, PackageVersion="Rev. H, 03/2007", Packaging="Tape and Reel", Packing="Tape and Reel", PartNumber=MMDL770T1G, Peak Reverse Current=200nA, Pins=2, Power Dissipation=200mW, Pricing="1=0.11, 25=0.054, 50=0.051, 100=0.047 (USD)", Radiation Hardening=No, REACH SVHC=Yes, Reverse Standoff Voltage=70V, RoHS=TRUE, Schedule B="8541100050, 8541100050|8541100050, 8541100050|8541100050|8541100050, 8541100050|8541100050|8541100050|8541100050", Stock=5789, Supplier=Avnet, Voltage Rating (DC)=70V, Width=1.35mm
D2: "Single Color LED, Ultra Bright Green, Water Clear, 1.1mm", Case Code (Imperial)=0603, Case Code (Metric)=1608, Color=Green, Forward Current=30mA, Forward Voltage=2.4V, Lens Color="Clear, Colorless", Manufacturer=Lite-On, Max Operating Temperature=85°C, Min Operating Temperature=-55°C, Power Dissipation=75mW, Reverse Voltage=5V, Supplier Part Number=160-1446-1-ND, Test Current=20mA, Case/Package=0603, Category=LEDs, China RoHS=Compliant, ComponentLink1Description=https://datasheet.octopart.com:443/LTST-C191KGKT-Lite-On-datasheet-86397321.pdf?src-supplier=Electro+Sonic, ComponentLink1URL=https://datasheet.octopart.com:443/LTST-C191KGKT-Lite-On-datasheet-86397321.pdf?src-supplier=Electro+Sonic, ComponentLink2Description=https://datasheet.octopart.com:443/LTST-C191KGKT-Lite-On-datasheet-180605192.pdf?src-supplier=IHS, ComponentLink2URL=https://datasheet.octopart.com:443/LTST-C191KGKT-Lite-On-datasheet-180605192.pdf?src-supplier=IHS, ComponentLink3Description=https://datasheet.octopart.com:443/LTST-C191KGKT-Lite-On-datasheet-159358.pdf?src-supplier=_legacy+Avnet, ComponentLink3URL=https://datasheet.octopart.com:443/LTST-C191KGKT-Lite-On-datasheet-159358.pdf?src-supplier=_legacy+Avnet, ComponentLink4Description=https://datasheet.octopart.com:443/LTST-C191KGKT-Lite-On-datasheet-165573808.pdf?src-supplier=TME, ComponentLink4URL=https://datasheet.octopart.com:443/LTST-C191KGKT-Lite-On-datasheet-165573808.pdf?src-supplier=TME, ComponentLink5Description=https://datasheet.octopart.com:443/LTST-C191KGKT-Lite-On-datasheet-43775822.pdf?src-supplier=TME, ComponentLink5URL=https://datasheet.octopart.com:443/LTST-C191KGKT-Lite-On-datasheet-43775822.pdf?src-supplier=TME, ComponentLink6Description=https://datasheet.octopart.com:443/LTST-C191KGKT-Lite-On-datasheet-32047002.pdf?src-supplier=Future+Electronics, ComponentLink6URL=https://datasheet.octopart.com:443/LTST-C191KGKT-Lite-On-datasheet-32047002.pdf?src-supplier=Future+Electronics, ComponentLink7Description=https://datasheet.octopart.com:443/LTST-C191KGKT-Lite-On-datasheet-65361.pdf?src-supplier=DigiKey, ComponentLink7URL=https://datasheet.octopart.com:443/LTST-C191KGKT-Lite-On-datasheet-65361.pdf?src-supplier=DigiKey, Contact Plating=Tin, Depth=800µm, Dominant Wavelength=571nm, Height=550µm, Illumination Color=Green, Lead Free="Lead Free", Length=1.6mm, Lens Style=Clear, Lens Transparency=Clear, Lifecycle Status=Production, Luminous Intensity=18mcd, Manufacturer Part Number=LTST-C191KGKT, Mounting Technology="Surface Mount", Number of Circuits=1, Number of Elements=1, Number of LEDs=1, Number of Terminals=2, Peak Wavelength=574nm, Pins=2, Power Rating=75mW, Pricing="1=0.15, 10=0.1, 100=0.0688, 500=0.05448, 1000=0.04972, 2000=0.04564, 5000=0.04116, 10000=0.03835, 15000=0.0369, 25000=0.03527, 35000=0.03429, 50000=0.03334, 125000=0.03124, 250000=0.02993 (USD)", Radiation Hardening=No, REACH SVHC=Yes, RoHS=Compliant, Schedule B="8541402000, 8541402000|8541402000|8541402000|8541402000|8541402000", Shape=Rectangular, Stock=2683248, Supplier=DigiKey, Terminal Pitch=1.5mm, Viewing Angle=130°, Wavelength=576.5nm, Width=800µm
J1: "USB Connector, USB Type C, USB 2.0, Receptacle, 24 Ways, Surface Mount, Through Hole Mount", Contact Resistance=40mΩ, Current Rating=5A, Insulation Resistance=100MΩ, Manufacturer=Amphenol, Supplier Part Number 1=29AK9975, Category=Connectors, ComponentLink1Description=https://datasheet.octopart.com:443/12402012E212A-Amphenol-Communications-Solutions-datasheet-182242347.pdf?src-supplier=IHS, ComponentLink1URL=https://datasheet.octopart.com:443/12402012E212A-Amphenol-Communications-Solutions-datasheet-182242347.pdf?src-supplier=IHS, Contact Gender=Male, Lifecycle Status=Production, Manufacturer Part Number=12402012E212A, Number of Ports=1, Number of Rows=1, Pins=24, Pricing 1="800=0.723, 1600=0.716, 3200=0.702, 4800=0.686, 8000=0.675 (CAD)", REACH SVHC=Yes, RoHS=Compliant, Shell Finish=Nickel, Shell Material="Stainless Steel", Stock 1=4800, Supplier 1=Newark, Terminal Pitch=500µm
J2 J3: library part 1.27mm_6pins_male_rightangle, "Pin Header 6 Position 1.27mm Pitch Single Row Through Hole, Right Angle -40℃~+105℃", Manufacturer=HanElectricity, Manufacturer Part Number=1271WR-6P
J4 J5 J6 J7 J8: "FFC/FPC Connector, 8 Contact(s), 1 Row(s), Right Angle, Solder Terminal, Natural Insulator", Actuator Color=Black, Flammability Rating="UL94 V-0", Housing Color=Natural, Manufacturer="TE Connectivity", Max Operating Temperature=85°C, Min Operating Temperature=-40°C, Operating Supply Voltage=50V, Actuator Material=Thermoplastic, Category="FFC / FPC", ComponentLink1Description=https://www.te.com/commerce/DocumentDelivery/DDEController?Action=srchrtrv&amp;DocNm=2328702&amp;DocType=Customer+Drawing&amp;DocLang=English&src-supplier=Digikey, ComponentLink1URL=https://www.te.com/commerce/DocumentDelivery/DDEController?Action=srchrtrv&amp;DocNm=2328702&amp;DocType=Customer+Drawing&amp;DocLang=English&src-supplier=Digikey, Connector System=Wire-to-Board, Contact Material="Copper Alloy", Contact Plating=Gold, Gender=Receptacle, Height=1mm, Housing Material=Thermoplastic, Length=6mm, Manufacturer Part Number=2328702-8, Mounting Technology="Surface Mount", Number of Contacts=8, Number of Positions=8, Number of Rows=1, Orientation="Right Angle", Packaging="Cut Tape", Plating=Gold, Pricing 1="28000=0.0961 (USD)", RoHS=Yes, Sealable="No (Without)", Series=-, Stock 1=56000, Supplier 1="Arrow Electronics", Supplier Part Number 1=2328702-8, Termination=Solder, Voltage Rating=50V
LED1: "Led Rgb Mixed White ( 1.6(L)X1.6", Manufacturer=Inolux, Manufacturer Part Number=B38G3RGB-10D0003H2U1930, RoHS=No, Supplier 1="Arrow Electronics", Supplier Part Number 1=B38G3RGB-10D0003H2U1930
P1: "Header, 5-Pin", Manufacturer=N/A, LatestRevisionDate=17-Jul-2002, LatestRevisionNote="Re-released for DXP Platform.", Manufacturer Part Number=N/A, Publisher="Altium Limited"
P2 P4: "Header, 4-Pin", Manufacturer=N/A, LatestRevisionDate=17-Jul-2002, LatestRevisionNote="Re-released for DXP Platform.", Manufacturer Part Number=N/A, Publisher="Altium Limited"
P3: "Header, 3-Pin, Dual row", Manufacturer=N/A, LatestRevisionDate=17-Jul-2002, LatestRevisionNote="Re-released for DXP Platform.", Manufacturer Part Number=N/A, Publisher="Altium Limited"
Q1 Q2: "Small Low ON Resistance MOSFET Array Dual N-Channel 20V 250mA 6-Pin SOT-563 T/R", Manufacturer=Toshiba, Supplier Part Number 1=757-SSM6N35AFELF, Category=MOSFETs, ComponentLink1Description=https://toshiba.semicon-storage.com/info/docget.jsp?did=55422&prodName=SSM6N35AFE&src-supplier=Digikey, ComponentLink1URL=https://toshiba.semicon-storage.com/info/docget.jsp?did=55422&prodName=SSM6N35AFE&src-supplier=Digikey, Manufacturer Part Number=SSM6N35AFE,LF, Pricing 1="1=0.14, 10=0.08, 50=0.08, 100=0.067, 1000=0.058, 10000=0.045 (USD)", RoHS=No, Stock 1=156554, Supplier 1=Mouser
Q3: "MOSFET P-CH 20V 3.7A SOT-23", Continuous Drain Current=-3.7A, Drain To Source Breakdown Voltage=-20V, Drain To Source Resistance=0.05Ω, Gate To Source Voltage=12V, Input Capacitace At Vds="633pF @ -10V", Manufacturer=Infineon, Max Forward Diode Voltage=-1.2V, Max Junction Temp=+150°C, Package=Micro3, Power Dissipation=1.3W, Pulse Drain Current=-22A, Temperature="-55°C to +150°C", Temperature Range Low=-55°C, Automotive=No, Category=Trans, ComponentLink2Description=Datasheet, ComponentLink2URL=https://www.infineon.com/dgdl/irlml6402pbf.pdf?fileId=5546d462533600a401535668d5c2263c, Depletion Mode=False, Device Class L1="Discrete Semiconductors", Device Class L2=Transistors, Device Class L3=MOSFETs, Digikey Description="MOSFET P-CH 20V 3.7A SOT-23", Drain To Source Voltage=-20V, Footprint Url=http://irf.com/package/outline/po_micro3.pdf, Gate Charge At Vgs="8nC @ -5V", Height=1.12mm, Ipc Land Pattern Name=SOT95P237X100-3, Lead Free=Yes, Manufacturer Part Number=IRLML6402TRPBF, Number of Channels=1, Number Of P Channels=1, Octopart=https://octopart.com/irlml6402trpbf-infineon-65874989, Reverse Recovery Charge=11nC, Reverse Recovery Time=29ns, RoHS=TRUE, Rthja Max=75°C/W, Standoff Height=0.01mm, Technology=MOSFET, Temperature Range High=+150°C, Threshold Vgs=-0.55V, Threshold Vgs Max=-1.2V, Threshold Vgs Min=-0.4V, Turn Off Delay Time=588ns, Turn On Delay Time=350ns
R1 R2: library part RC0402FR-075K1L, "62.5mW Thick Film Resistors 50V ±100ppm/℃ ±1% 5.1kΩ 0402 Chip Resistor - Surface Mount ROHS", Case Code (Imperial)=0402, Manufacturer="Yageo Group", Max Operating Temperature=155°C, Max Power Dissipation=63mW, Min Operating Temperature=-55°C, Power Dissipation=62.5mW, Temperature Coefficient=100ppm/°C, Tolerance=1%, Voltage Rating=50V, Case/Package=0402, Category="Chip SMD Resistors", China RoHS=Non-Compliant, ComponentLink1Description=https://datasheet.octopart.com:443/RC0402FR-075K1L-Yageo-datasheet-175887523.pdf?src-supplier=IHS, ComponentLink1URL=https://datasheet.octopart.com:443/RC0402FR-075K1L-Yageo-datasheet-175887523.pdf?src-supplier=IHS, ComponentLink2Description=https://datasheet.octopart.com:443/RC0402FR-075K1L-Yageo-datasheet-103092701.pdf?src-supplier=Upverter, ComponentLink2URL=https://datasheet.octopart.com:443/RC0402FR-075K1L-Yageo-datasheet-103092701.pdf?src-supplier=Upverter, ComponentLink3Description=https://datasheet.octopart.com:443/RC0402FR-075K1L-Yageo-datasheet-10408619.pdf?src-supplier=Newark, ComponentLink3URL=https://datasheet.octopart.com:443/RC0402FR-075K1L-Yageo-datasheet-10408619.pdf?src-supplier=Newark, ComponentLink4Description=https://datasheet.octopart.com:443/RC0402FR-075K1L-Yageo-datasheet-8324527.pdf?src-supplier=Newark, ComponentLink4URL=https://datasheet.octopart.com:443/RC0402FR-075K1L-Yageo-datasheet-8324527.pdf?src-supplier=Newark, ComponentLink5Description=https://datasheet.octopart.com:443/RC0402FR-075K1L-Yageo-datasheet-62067350.pdf?src-supplier=element14+APAC, ComponentLink5URL=https://datasheet.octopart.com:443/RC0402FR-075K1L-Yageo-datasheet-62067350.pdf?src-supplier=element14+APAC, ComponentLink6Description=https://datasheet.octopart.com:443/RC0402FR-075K1L-Yageo-datasheet-164759695.pdf?src-supplier=Future+Electronics, ComponentLink6URL=https://datasheet.octopart.com:443/RC0402FR-075K1L-Yageo-datasheet-164759695.pdf?src-supplier=Future+Electronics, ComponentLink7Description=https://datasheet.octopart.com:443/RC0402FR-075K1L-Yageo-datasheet-137700087.pdf?src-supplier=Future+Electronics, ComponentLink7URL=https://datasheet.octopart.com:443/RC0402FR-075K1L-Yageo-datasheet-137700087.pdf?src-supplier=Future+Electronics, ComponentLink8Description=https://datasheet.octopart.com:443/RC0402FR-075K1L-Yageo-datasheet-12531192.pdf?src-supplier=Future+Electronics, ComponentLink8URL=https://datasheet.octopart.com:443/RC0402FR-075K1L-Yageo-datasheet-12531192.pdf?src-supplier=Future+Electronics, ComponentLink9Description=https://datasheet.octopart.com:443/RC0402FR-075K1L-Yageo-datasheet-505231.pdf?src-supplier=Future+Electronics, ComponentLink9URL=https://datasheet.octopart.com:443/RC0402FR-075K1L-Yageo-datasheet-505231.pdf?src-supplier=Future+Electronics, ComponentLink10Description=https://datasheet.octopart.com:443/RC0402FR-075K1L-Yageo-datasheet-148775077.pdf?src-supplier=TME, ComponentLink10URL=https://datasheet.octopart.com:443/RC0402FR-075K1L-Yageo-datasheet-148775077.pdf?src-supplier=TME, ComponentLink11Description=https://datasheet.octopart.com/RC0402FR-075K1L-Yageo-datasheet-73766026.pdf, ComponentLink11URL=https://datasheet.octopart.com/RC0402FR-075K1L-Yageo-datasheet-73766026.pdf, ComponentLink12Description=https://datasheet.octopart.com:443/RC0402FR-075K1L-Yageo-datasheet-8329306.pdf?src-supplier=element14, ComponentLink12URL=https://datasheet.octopart.com:443/RC0402FR-075K1L-Yageo-datasheet-8329306.pdf?src-supplier=element14, ComponentLink13Description=http://sigma.octopart.com:80/rohs_statement/Yageo-company-2.pdf?src-supplier=Compliance+Statements, ComponentLink13URL=http://sigma.octopart.com:80/rohs_statement/Yageo-company-2.pdf?src-supplier=Compliance+Statements, ComponentLink14Description=http://sigma.octopart.com:80/conflict_mineral_statement/Yageo-company-3.pdf?src-supplier=Compliance+Statements, ComponentLink14URL=http://sigma.octopart.com:80/conflict_mineral_statement/Yageo-company-3.pdf?src-supplier=Compliance+Statements, Composition="Thick Film", Depth=500µm, Features="Moisture Resistant", Height=350µm, Lead Free="Lead Free", Length=1mm, Lifecycle Status=Production, Manufacturer Part Number=RC0402FR-075K1L, Military Standard=Not, Mounting Technology="Surface Mount", Number of Terminals=2, Number of Terminations=2, Packaging="Cut Tape", Pins=2, Power Rating=63mW, Pricing 1="10000=0.00097, 20000=0.00093, 40000=0.0009, 60000=0.00087, 80000=0.00084 (USD)", REACH SVHC=Yes, Resistance=5.1kR, RoHS=Compliant, Schedule B="8533210045, 8533210045|8533210045, 8533210045|8533210045|8533210045, 8533210045|8533210045|8533210045|8533210045", Stock 1=140000, Supplier 1=Avnet, Supplier Part Number 1=RC0402FR-075K1L, Termination=SMD/SMT, Voltage Rating (DC)=50V, Width=500µm, Working Voltage=50V
R3: library part CRCW1206390RFKEAHP, "Res Thick Film 1206 390 Ohm 1% 0.75W(3/4W) ±100ppm/°C Pad SMD Automotive T/R", Case Code (Imperial)=1206, Case Code (Metric)=3216, Manufacturer=Vishay, Max Operating Temperature=155°C, Max Power Dissipation=500mW, Min Operating Temperature=-55°C, Package Quantity=10, Resistance Tolerance=1%, Resistor Type="Thick Film", Supplier Part Number 1=71-CRCW1206390RFKEAH, Temperature Coefficient=100ppm/°C, Voltage Rating=200V, Case/Package=1206, Category="Chip SMD Resistors", ComponentLink1Description=https://datasheet.ciiva.com/6546/crcwhpe3-6546213.pdf?src-supplier=Digikey, ComponentLink1URL=https://datasheet.ciiva.com/6546/crcwhpe3-6546213.pdf?src-supplier=Digikey, ComponentLink2Description=https://datasheet.ciiva.com/48524/crcwhpe3-48524826.pdf?src-supplier=Avnet, ComponentLink2URL=https://datasheet.ciiva.com/48524/crcwhpe3-48524826.pdf?src-supplier=Avnet, ComponentLink3Description=https://datasheet.ciiva.com/7673/1885357-7673082.pdf?src-supplier=Element14, ComponentLink3URL=https://datasheet.ciiva.com/7673/1885357-7673082.pdf?src-supplier=Element14, ComponentLink4Description=https://datasheet.ciiva.com/7673/1885357-7673081.pdf?src-supplier=Element14, ComponentLink4URL=https://datasheet.ciiva.com/7673/1885357-7673081.pdf?src-supplier=Element14, Contact Plating=Tin, Depth=1.6mm, Features="Automotive AEC-Q200", Height=0.026inch, Lead Free="Lead Free", Length=0.122inch, Manufacturer Part Number=CRCW1206390RFKEAHP, Number of Terminations=2, Packaging="Cut Tape", Power Rating=500mW, Pricing 1="1=0.32, 10=0.115, 50=0.115, 100=0.073, 1000=0.058, 10000=0.044 (USD)", Reach SVHC Compliant=Unknown, Resistance=390R, RoHS=Yes, RoHS Compliant=Yes, Series=CRCW-HP, Stock 1=1207, Supplier 1=Mouser, Technology="THICK FILM", Termination=SMD/SMT, Tolerance=1%, Voltage Rating (DC)=200V, Width=0.063inch
R4: library part YC164-JR-0733RL, "Res Thick Film Array 33 Ohm 5% 200ppm/ C ISOL Molded 8-Pin 1206(4 X 0603) Convex SMD Paper T/R", Case Code (Imperial)=1206, Case Code (Metric)=3216, Case/Package=0603, Manufacturer=Yageo, Max Operating Temperature=155°C, Min Operating Temperature=-55°C, Number of Resistors=4, Package Quantity=1, Power Dissipation=62.5mW, Resistance Tolerance=5%, Supplier Part Number 1=1128537, Temperature Coefficient=200ppm/°C, Voltage Rating=50V, Category="Resistor Arrays", Circuit Type=Isolated, ComponentLink1Description=https://datasheet.ciiva.com/2688/pyu-yc-tc164-51-rohs-l-3-2688397.pdf?src-supplier=Digikey, ComponentLink1URL=https://datasheet.ciiva.com/2688/pyu-yc-tc164-51-rohs-l-3-2688397.pdf?src-supplier=Digikey, ComponentLink2Description=https://datasheet.ciiva.com/2688/pyu-yc-tc164-51-rohs-l-3-2688398.pdf?src-supplier=Digikey, ComponentLink2URL=https://datasheet.ciiva.com/2688/pyu-yc-tc164-51-rohs-l-3-2688398.pdf?src-supplier=Digikey, ComponentLink3Description=https://datasheet.ciiva.com/2688/pyu-yc-tc164-51-rohs-l-3-2688399.pdf?src-supplier=Digikey, ComponentLink3URL=https://datasheet.ciiva.com/2688/pyu-yc-tc164-51-rohs-l-3-2688399.pdf?src-supplier=Digikey, ComponentLink4Description=https://datasheet.ciiva.com/8320/pyu-yc-tc164-51-rohs-l-3-8320237.pdf?src-supplier=Avnet, ComponentLink4URL=https://datasheet.ciiva.com/8320/pyu-yc-tc164-51-rohs-l-3-8320237.pdf?src-supplier=Avnet, ComponentLink5Description=https://datasheet.ciiva.com/8018/443424-8018013.pdf?src-supplier=Element14, ComponentLink5URL=https://datasheet.ciiva.com/8018/443424-8018013.pdf?src-supplier=Element14, ComponentLink6Description=https://datasheet.ciiva.com/8018/443424-8018014.pdf?src-supplier=Element14, ComponentLink6URL=https://datasheet.ciiva.com/8018/443424-8018014.pdf?src-supplier=Element14, Height=0.028inch, Lead Free="Lead Free", Length=0.126inch, Manufacturer Part Number=YC164-JR-0733RL, Mounting Technology="Surface Mount", Number of Circuits=4, Number of Contacts=8, Number of Elements=4, Packaging="Cut Tape", Pins=8, Power Per Element=62.5mW, Pricing 1="5000=0.0064, 15000=0.0062, 25000=0.0061, 50000=0.006, 100000=0.0058 (USD)", Reach SVHC Compliant=Unknown, Resistance=33R, RoHS=Yes, RoHS Compliant=Yes, Series=YC164, Stock 1=105000, Supplier 1="Future Electronics", Technology="THICK FILM", Tolerance=5%, Width=0.063inch, Working Voltage=50V
R5: library part RC0402FR-07115KL, "62.5mW Thick Film Resistors 50V ±100ppm/℃ ±1% 115kΩ 0402 Chip Resistor - Surface Mount ROHS", Case Code (Imperial)=0402, Case Code (Metric)=1005, Manufacturer="Yageo Group", Max Operating Temperature=155°C, Max Power Dissipation=63mW, Min Operating Temperature=-55°C, Power Dissipation=62.5mW, Supplier Part Number 1=49AK1243, Temperature Coefficient=100ppm/°C, Tolerance=1%, Voltage Rating=50V, Case/Package=0402, Category="Chip SMD Resistors", China RoHS=Non-Compliant, ComponentLink1Description=https://datasheet.octopart.com:443/RC0402FR-07115KL-Yageo-datasheet-175887523.pdf?src-supplier=Newark, ComponentLink1URL=https://datasheet.octopart.com:443/RC0402FR-07115KL-Yageo-datasheet-175887523.pdf?src-supplier=Newark, ComponentLink2Description=https://datasheet.octopart.com:443/RC0402FR-07115KL-Yageo-datasheet-103092701.pdf?src-supplier=Upverter, ComponentLink2URL=https://datasheet.octopart.com:443/RC0402FR-07115KL-Yageo-datasheet-103092701.pdf?src-supplier=Upverter, ComponentLink3Description=https://datasheet.octopart.com:443/RC0402FR-07115KL-Yageo-datasheet-10408619.pdf?src-supplier=_legacy+Avnet, ComponentLink3URL=https://datasheet.octopart.com:443/RC0402FR-07115KL-Yageo-datasheet-10408619.pdf?src-supplier=_legacy+Avnet, ComponentLink4Description=https://datasheet.octopart.com:443/RC0402FR-07115KL-Yageo-datasheet-164759695.pdf?src-supplier=Future+Electronics, ComponentLink4URL=https://datasheet.octopart.com:443/RC0402FR-07115KL-Yageo-datasheet-164759695.pdf?src-supplier=Future+Electronics, ComponentLink5Description=https://datasheet.octopart.com:443/RC0402FR-07115KL-Yageo-datasheet-137700087.pdf?src-supplier=Future+Electronics, ComponentLink5URL=https://datasheet.octopart.com:443/RC0402FR-07115KL-Yageo-datasheet-137700087.pdf?src-supplier=Future+Electronics, ComponentLink6Description=https://datasheet.octopart.com:443/RC0402FR-07115KL-Yageo-datasheet-12531192.pdf?src-supplier=Future+Electronics, ComponentLink6URL=https://datasheet.octopart.com:443/RC0402FR-07115KL-Yageo-datasheet-12531192.pdf?src-supplier=Future+Electronics, ComponentLink7Description=https://datasheet.octopart.com/RC0402FR-07115KL-Yageo-datasheet-73766026.pdf, ComponentLink7URL=https://datasheet.octopart.com/RC0402FR-07115KL-Yageo-datasheet-73766026.pdf, ComponentLink8Description=http://sigma.octopart.com:80/rohs_statement/Yageo-company-2.pdf?src-supplier=Compliance+Statements, ComponentLink8URL=http://sigma.octopart.com:80/rohs_statement/Yageo-company-2.pdf?src-supplier=Compliance+Statements, ComponentLink9Description=http://sigma.octopart.com:80/conflict_mineral_statement/Yageo-company-3.pdf?src-supplier=Compliance+Statements, ComponentLink9URL=http://sigma.octopart.com:80/conflict_mineral_statement/Yageo-company-3.pdf?src-supplier=Compliance+Statements, Composition="Thick Film", Contact Plating=Tin, Depth=500µm, Features="Moisture Resistant", Height=350µm, Lead Free="Lead Free", Length=1mm, Lifecycle Status=Production, Manufacturer Part Number=RC0402FR-07115KL, Military Standard=Not, Mounting Technology="Surface Mount", Number of Terminals=2, Number of Terminations=2, Power Rating=63mW, Pricing 1="1=0.104, 25=0.009, 100=0.005, 500=0.004 (USD)", REACH SVHC=Yes, Resistance=115kR, RoHS=Compliant, Schedule B="8533210045, 8533210045|8533210045|8533210045|8533210045|8533210045", Stock 1=4067, Supplier 1=Avnet, Termination=SMD/SMT, Voltage Rating (DC)=50V, Width=500µm, Working Voltage=50V
SB1 SB2: library part SOLDERBRIDGE, Artikkelnr Noca=N.A., Artikkelnr Simpro=N.A., Footprint Doc=Solderbridge, LatestRevisionDate=2009-12-14, Part Number=Solderbridge, Pin Count=2, Published=2009-12-14, Publisher="Nordic Semiconductor"
SB3: library part SOLDERBRIDGE_SHORTED, "Shorted Solderbridge", Part Number="Solderbridge Shorted", Artikkelnr Noca=N.A., Artikkelnr Simpro=N.A., Footprint Doc=Solderbridge_Shorted, LatestRevisionDate=2012-08-07, Pin Count=2, Published=2012-08-07, Publisher="Nordic Semiconductor"
SW1: "SWITCH TACTILE SPST-NO 0.05A 12V", Contact Current Rating=50mA, Contact Resistance=100mR, Manufacturer="Omron Electronics Inc-EMC Div", Max Operating Temperature=70°C, Max Voltage Rating (DC)=12V, Min Operating Temperature=-25°C, Operating Force=1.5N, Package Quantity=1, Ratings="Dust Proof", Actuator Length=0.4mm, Actuator Type=Standard, Contact Plating=Silver, Current Rating=50mA, Depth=4mm, Electrical Life=200000Cycles, Illumination Type=Non-Illuminated, Lead Free="Lead Free", Length=3.15mm, Manufacturer Part Number=B3U-1100P, Max Current Rating=50mA, Mechanical Life=200000Cycles, Mount="Surface Mount", Orientation=Straight, Packaging="Tape and Reel", Switch Function=Off-Mom, Switch Travel=0.15mm, Termination=SMD/SMT, Throw Configuration=SPST, Voltage Rating (DC)=12V, Weight=0.022g
U1: "Ultra Low Capacitance ESD Protection Array for High Speed Data Line Protection, 6-Pin UDFN, Pb-Free, Tape and Reel", Manufacturer="On Semiconductor", C Max (pF)=0.6, ComponentLink1Description="Manufacturer URL", ComponentLink1URL=http://www.onsemi.com/, ComponentLink2Description=Datasheet, ComponentLink2URL=http://www.onsemi.cn/pub_link/Collateral/ESDR0502N-D.PDF, ComponentLink3Description="Package Specification", ComponentLink3URL=http://www.onsemi.com/pub_link/Collateral/517AA.PDF, DatasheetVersion="Rev. 4", Direction=Unidirectional, IR Max (uA)=1, Manufacturer Part Number=ESDR0502NMUTBG, Mounting Technology="Surface Mount", Number of Lines=4, PackageDescription="6-Pin Small Outline No-Lead, Body 1.2 x 1 mm, Pitch 0.4 mm", PackageReference=UDFN-6-517AA-01, PackageVersion="Rev. D, 09/2010", Packing="Tape and Reel", PartNumber=ESDR0502NMUTBG, PPK Max (W)=100, RoHS=Pb-Free, V(BR) Min (V)=6, VRWM Max (V)=5.5
U2: "300-mA, ultra-low-noise, low-IQ, low-dropout (LDO) linear regulator with high PSRR 5-SOT-23 -40 to 125", Manufacturer="Texas Instruments", Supplier Part Number 1=595-TPS7A2030PDBVR, Category="Voltage Regulators - Linear", Manufacturer Part Number=TPS7A2030PDBVR, Pricing 1="1=0.49000, 10=0.41800, 50=0.41800, 100=0.29000, 1000=0.19000, 10000=0.15200 (USD)", RoHS=Yes, RoHS Compliant=Yes, Stock 1=22538, Supplier 1=Mouser